# Altium PCB PCB_4-layer.PcbDoc (part 1 of 2)
Units mm, origin at the board's own origin, x right, y up, seen from the top; angles counter-clockwise.
Board outline 60 x 50 mm, 4 copper layers (Top Copper, Signal Layer 1, Signal Layer 2, Bottom Copper), stack 1.57 mm thick; 115 components, 74 nets, 379 pads, 168 vias.
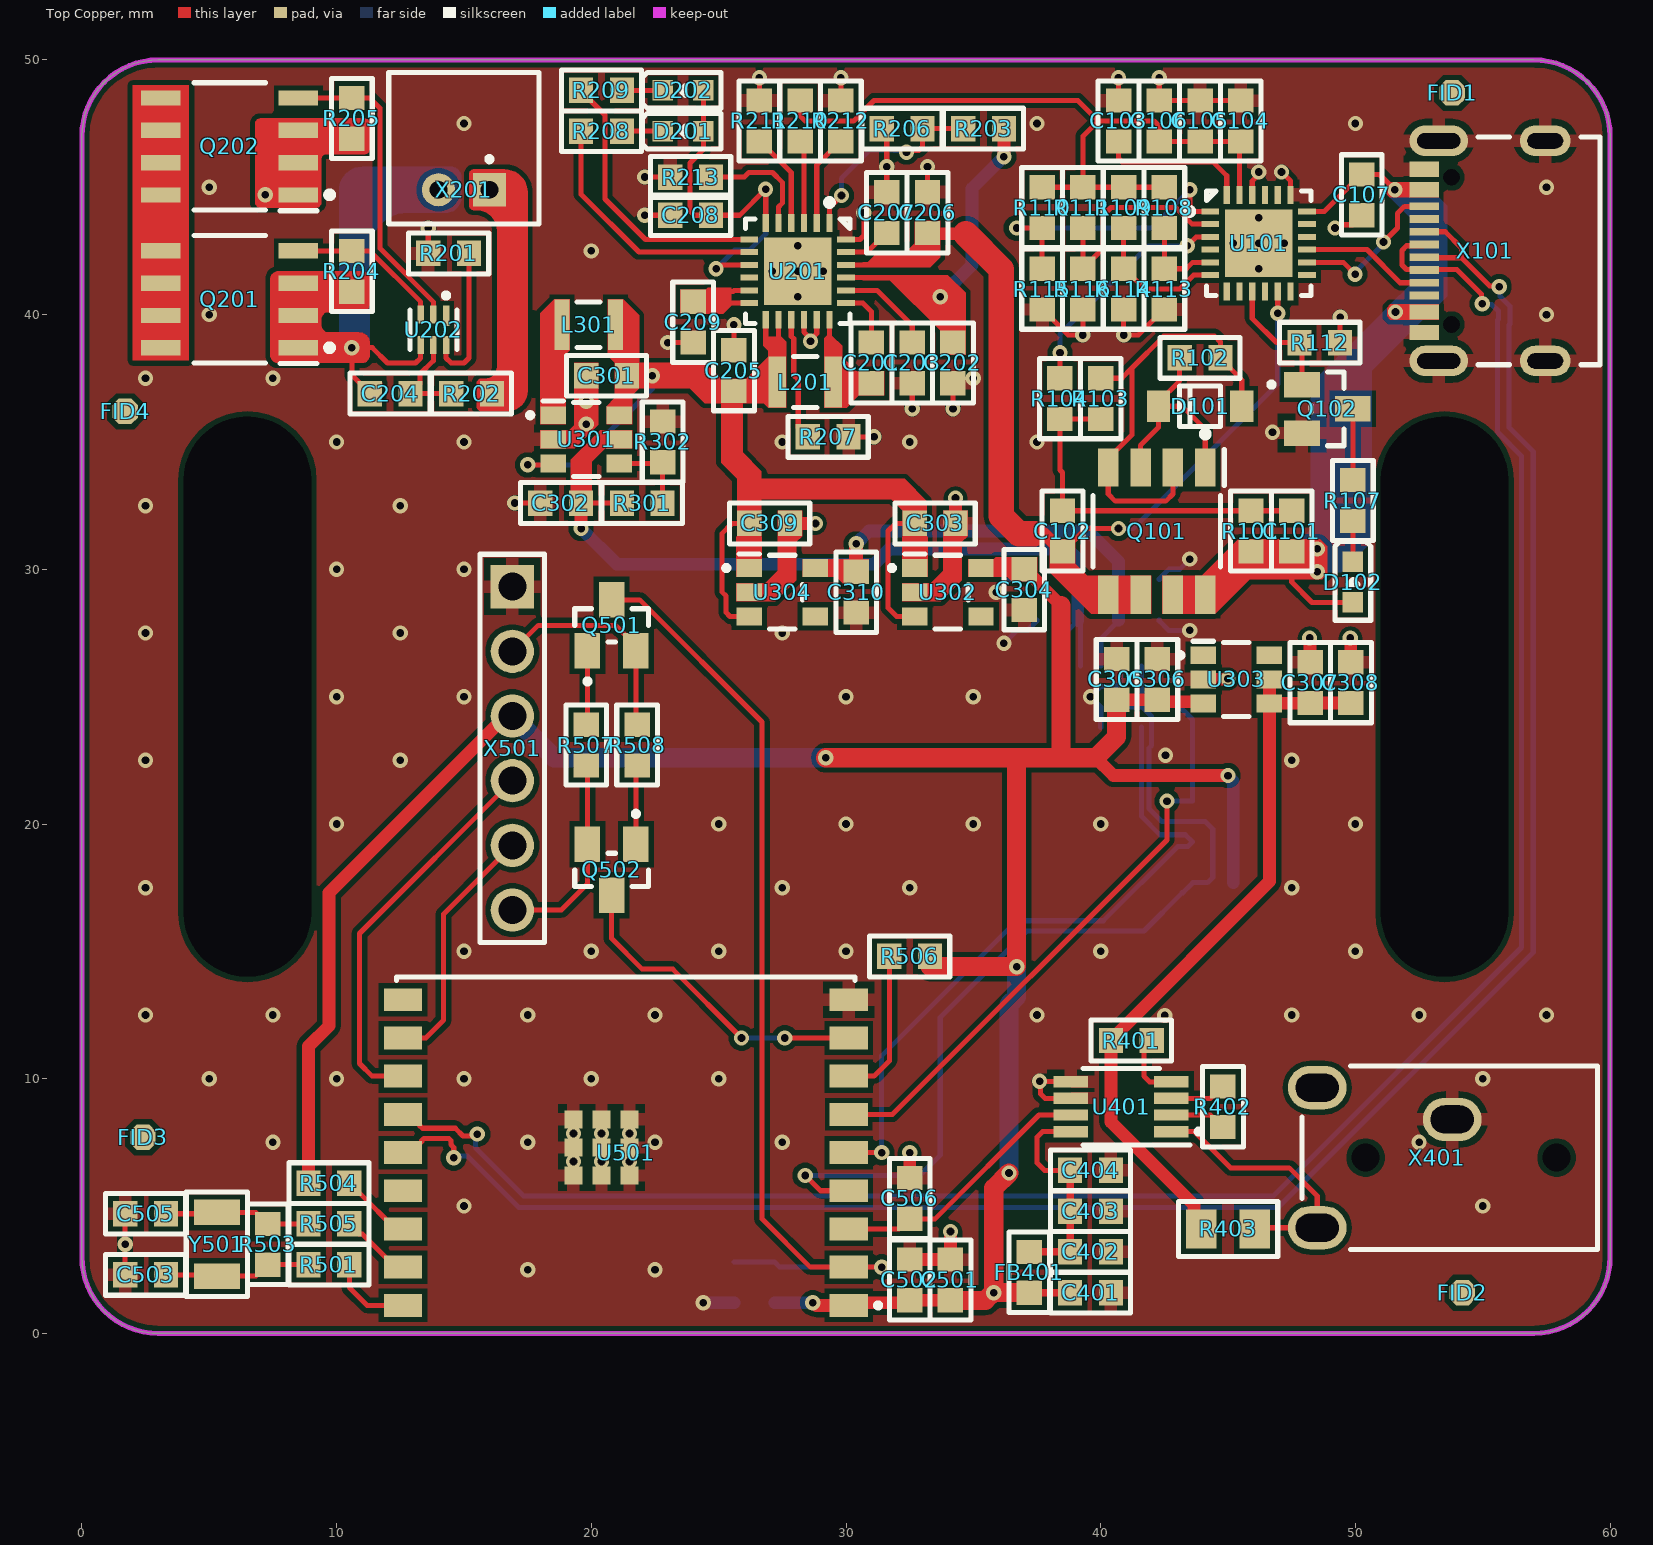
[diagram p0: Top Copper view]
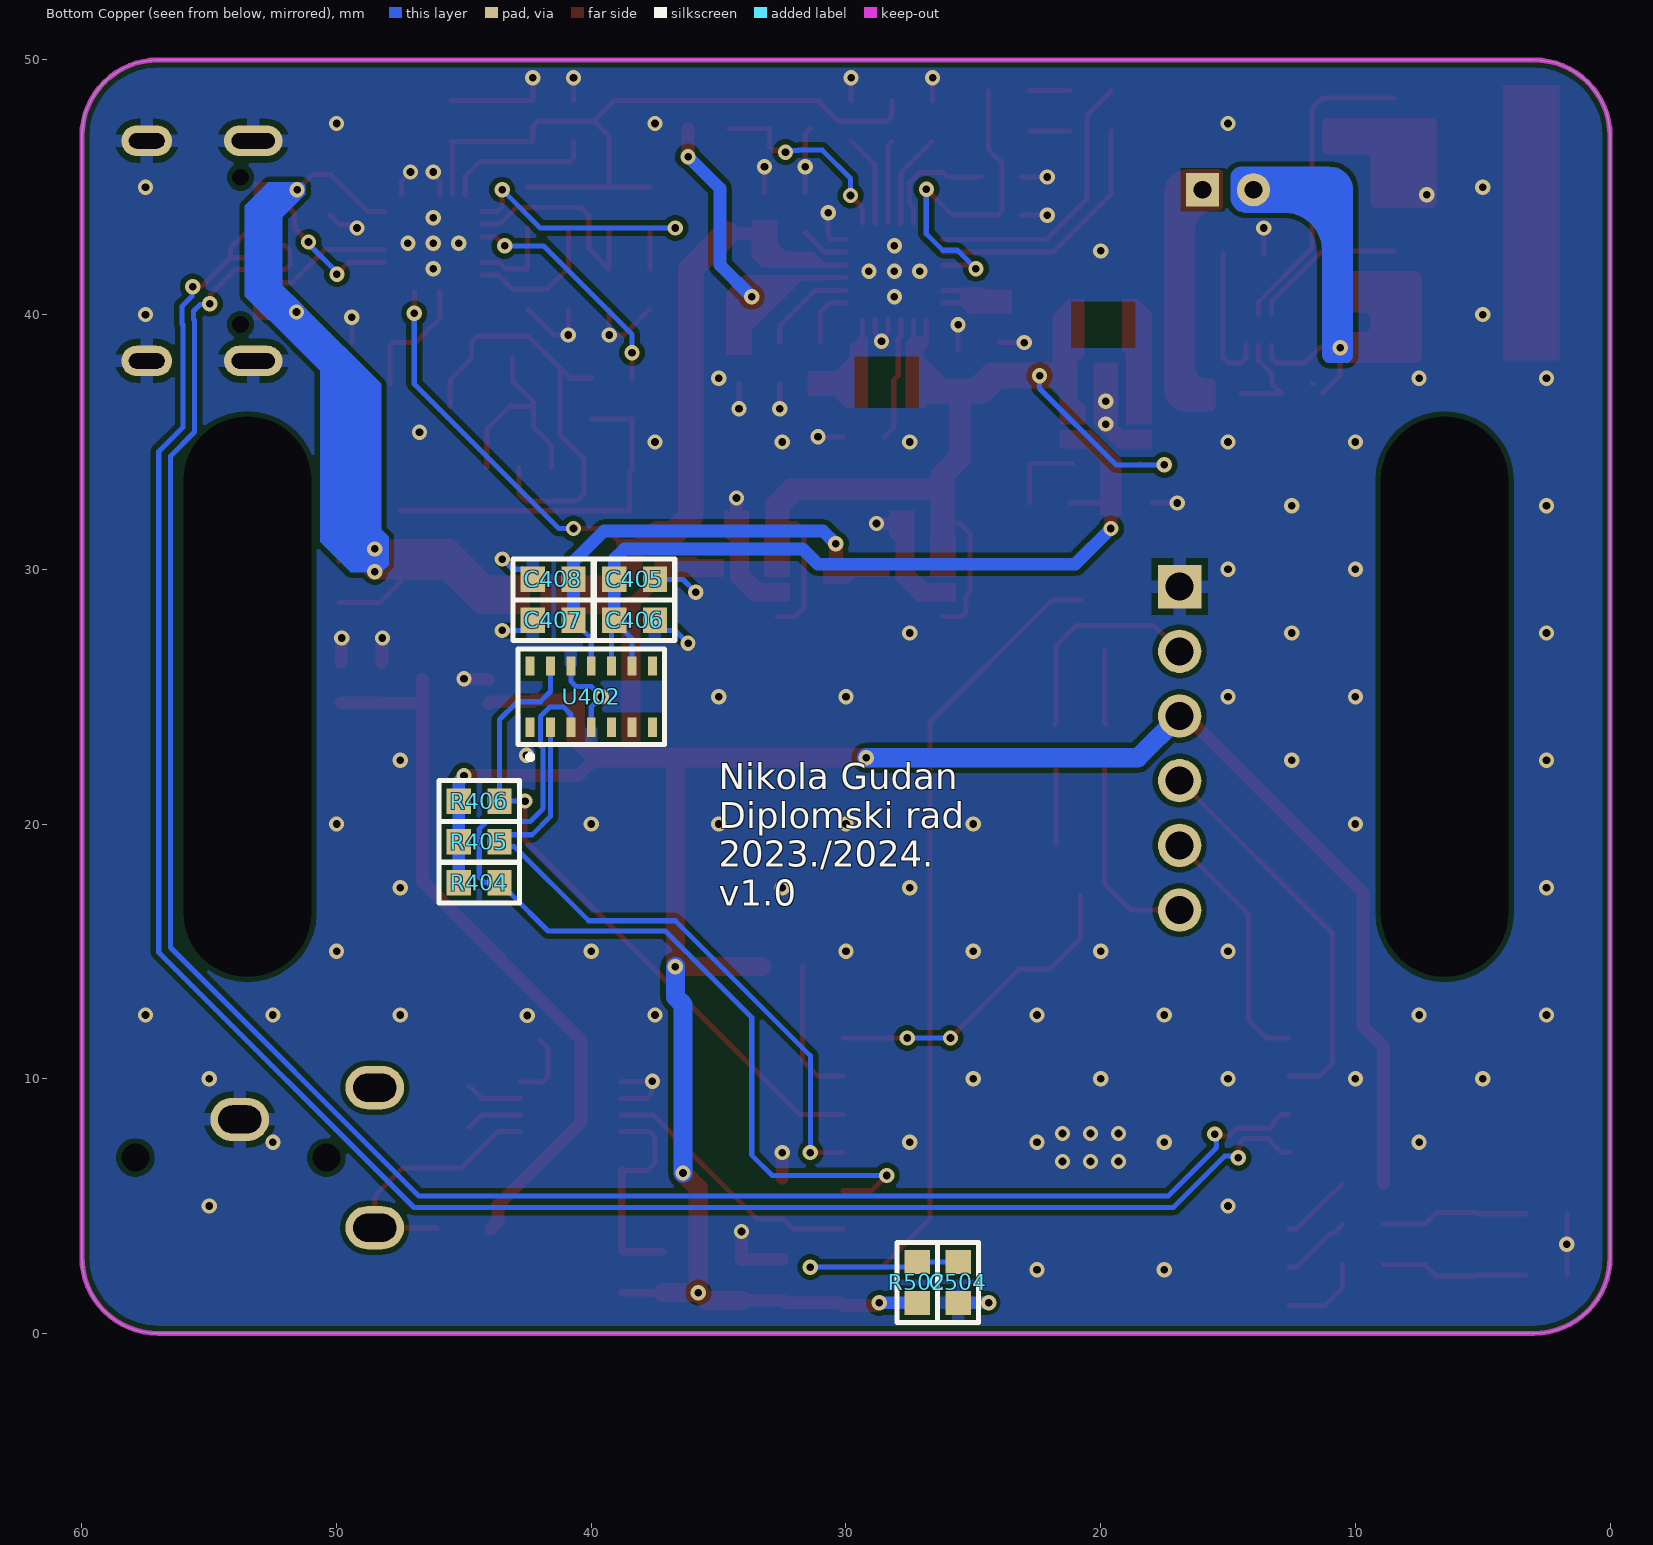
[diagram p1: Bottom Copper view, seen from below]
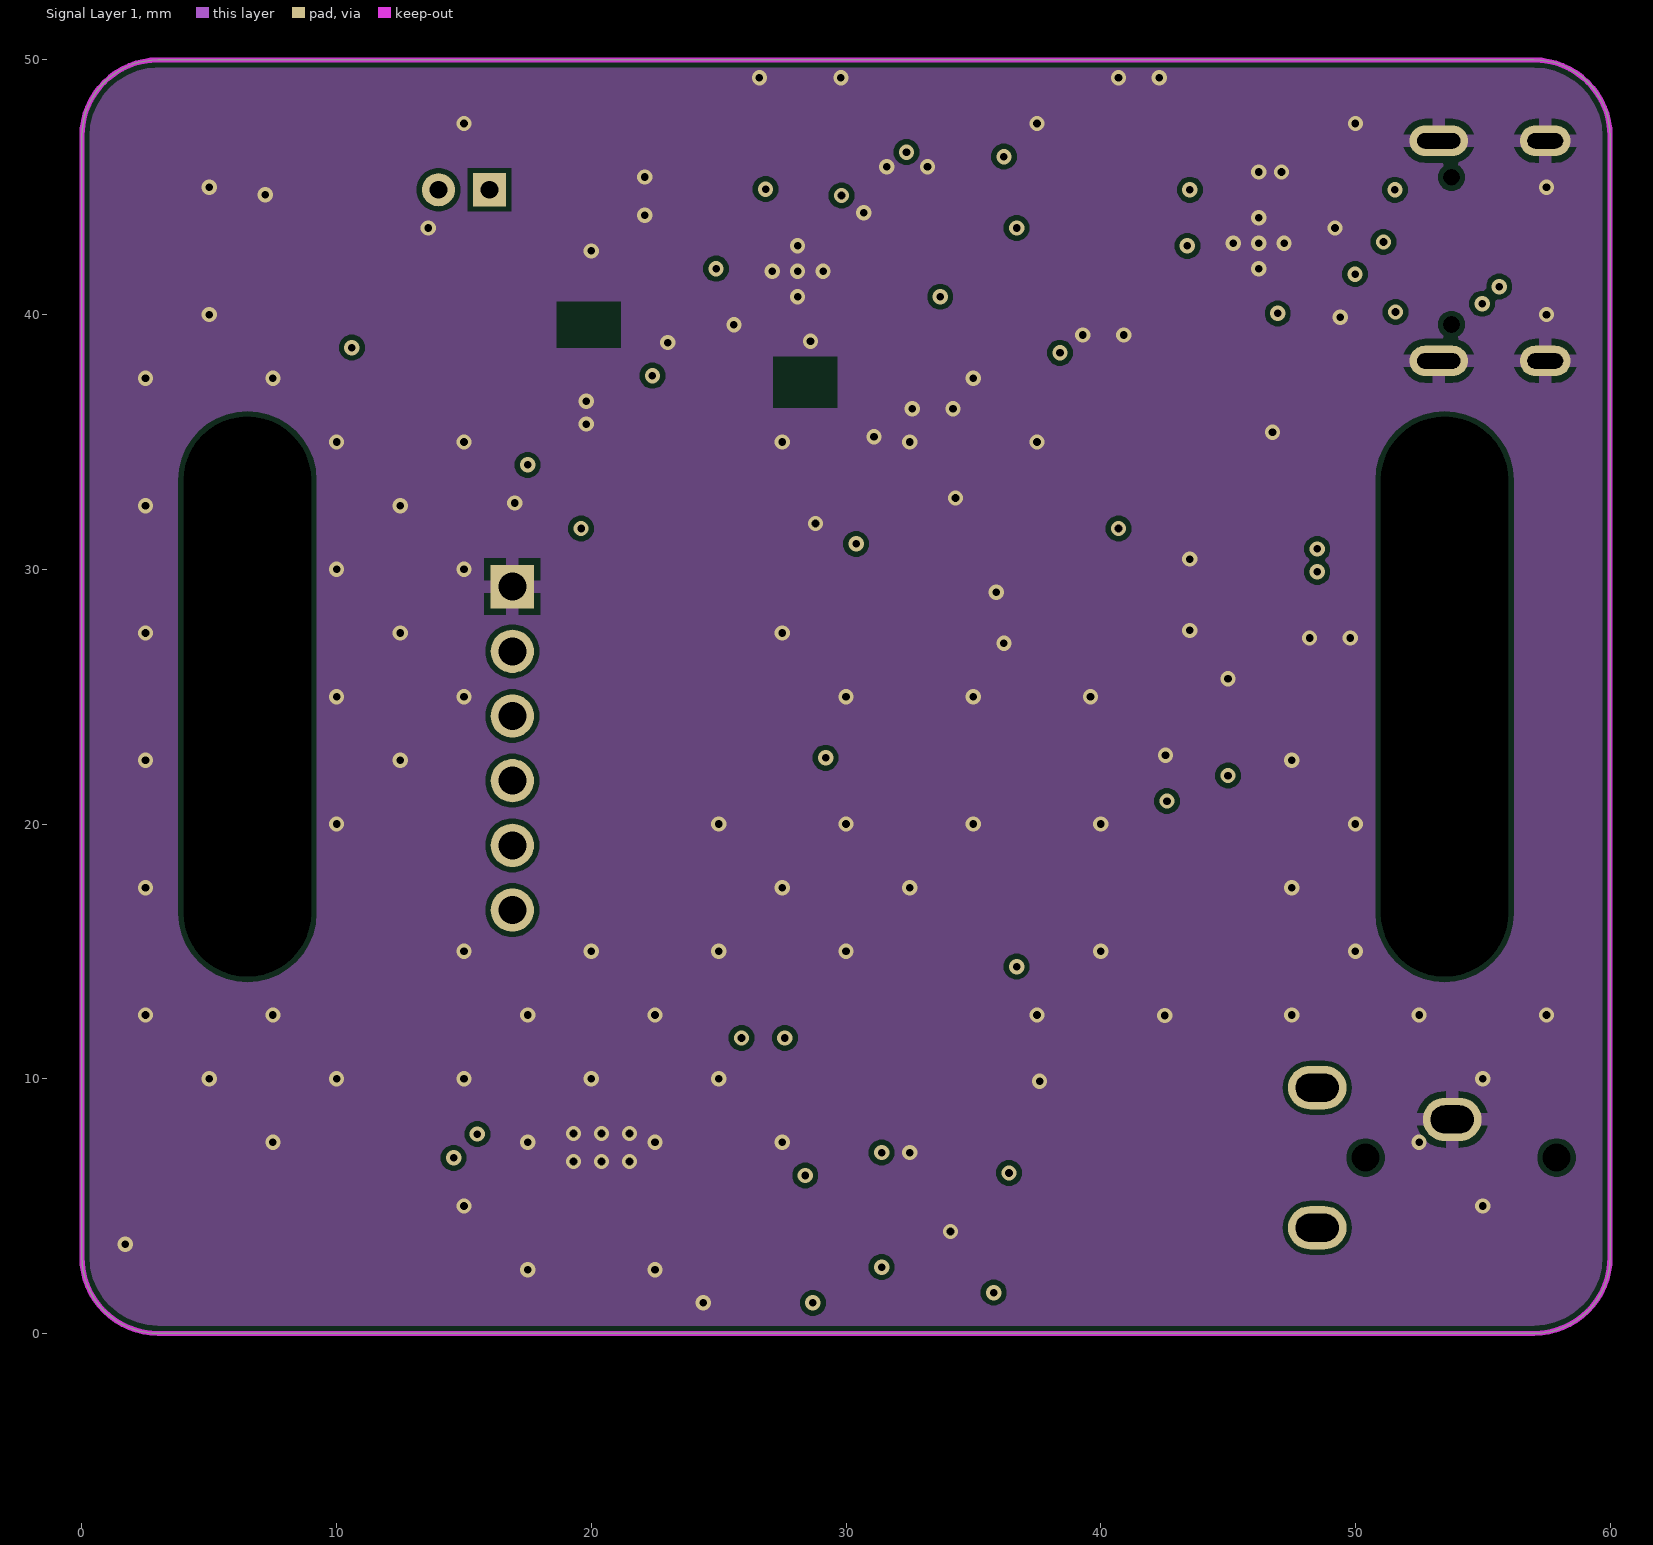
[diagram p2: Signal Layer 1]
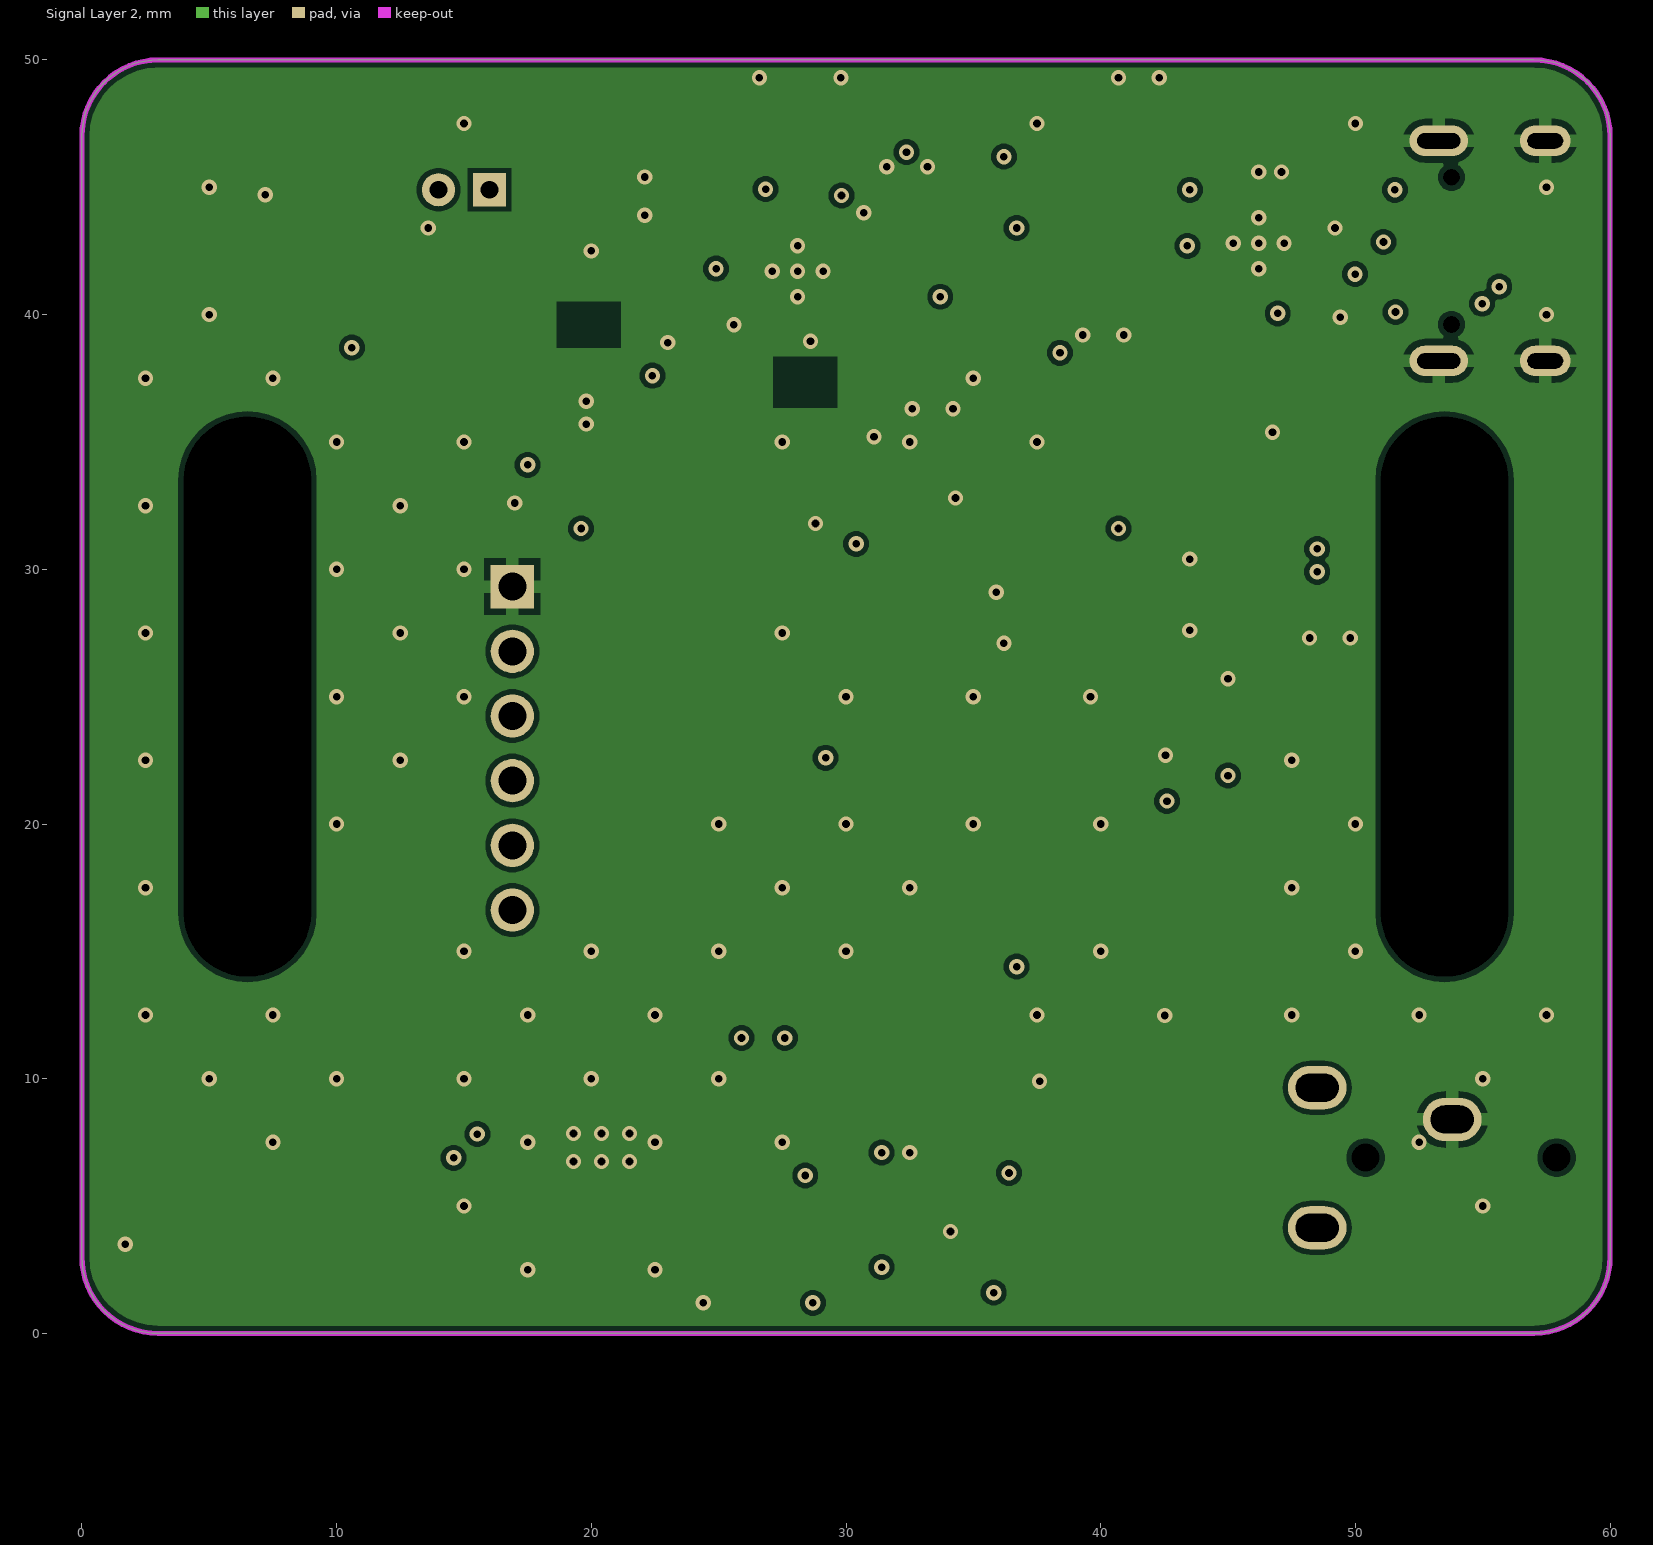
[diagram p3: Signal Layer 2]
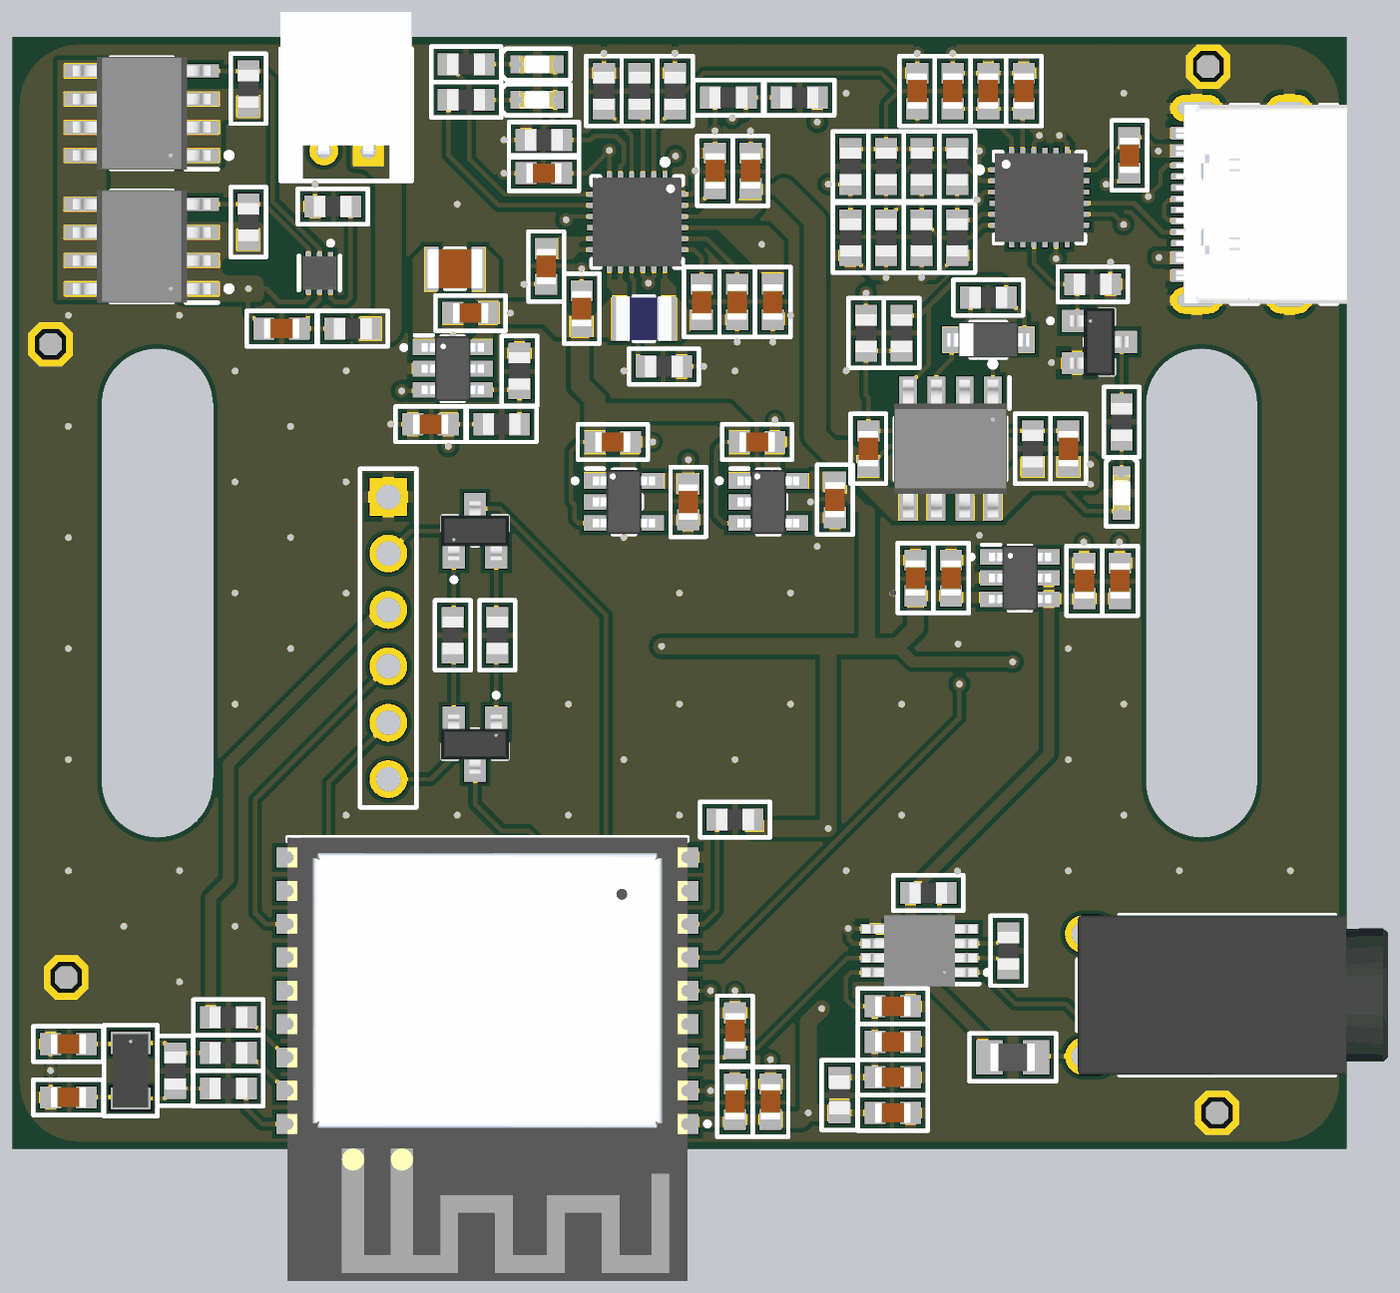
[diagram p5: 3D render of the assembled board from above, using the file's embedded part models]
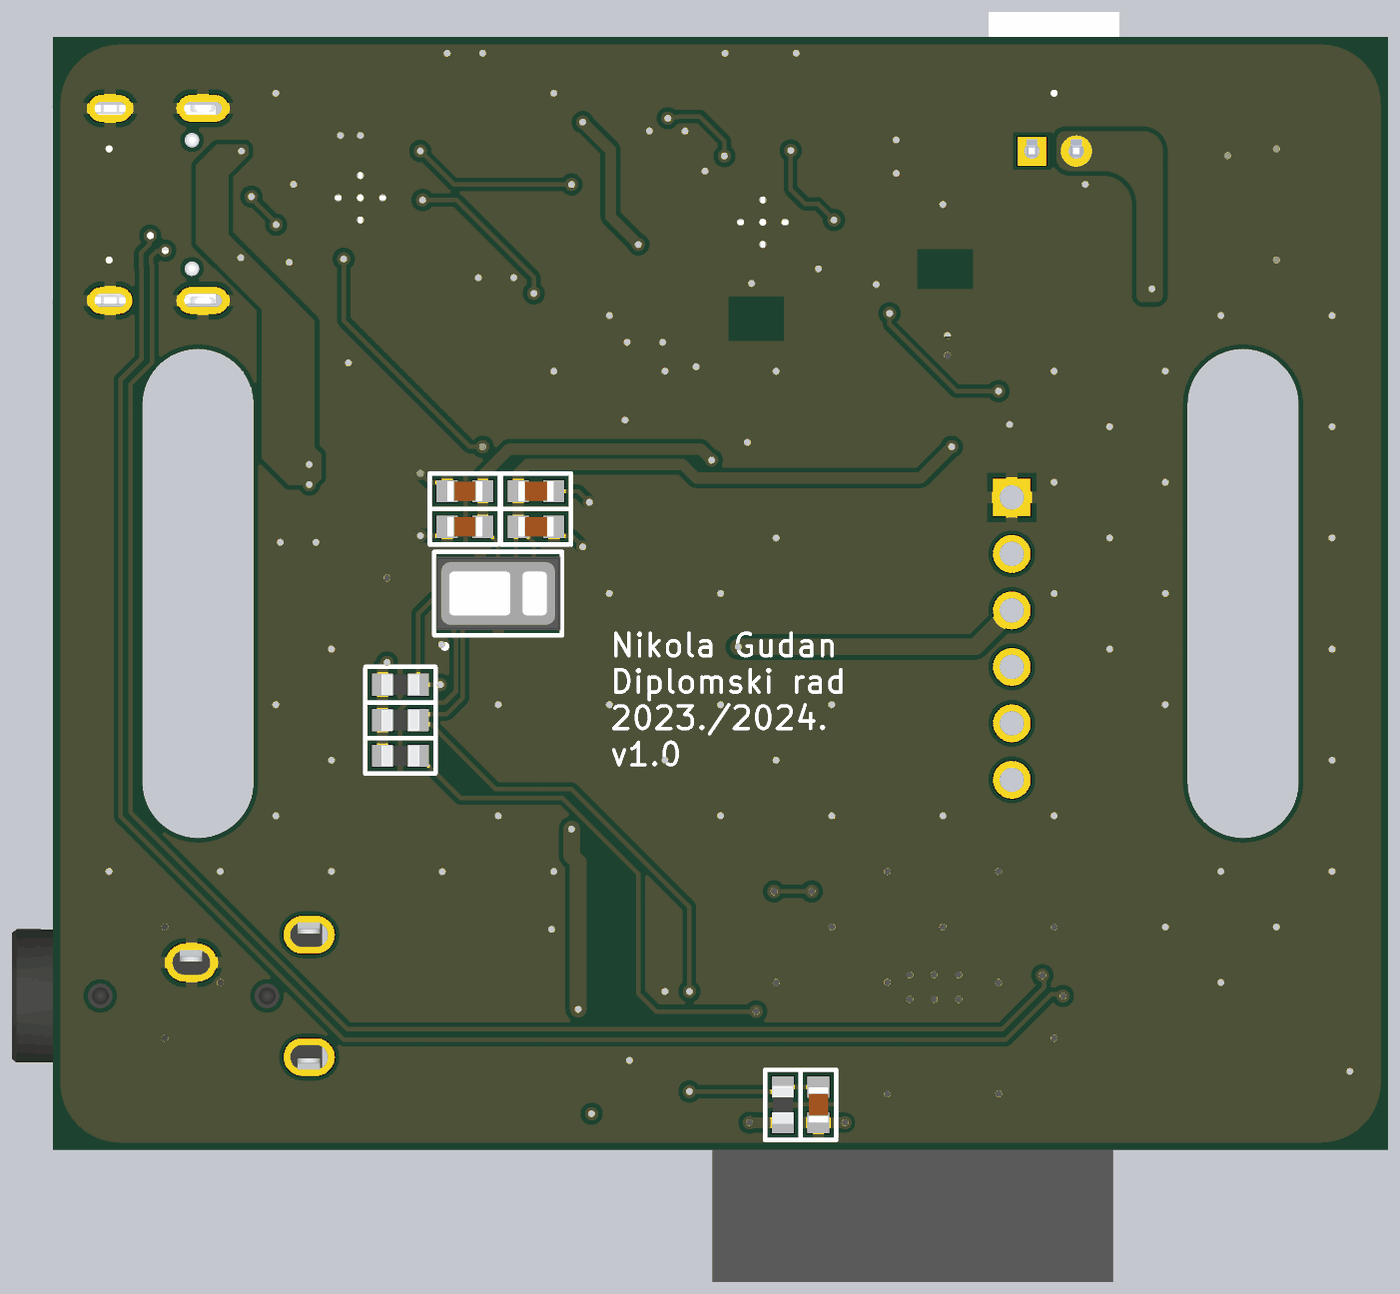
[diagram p6: 3D render of the assembled board from below, using the file's embedded part models]

## Layer stack, top to bottom
Top Mask: solder mask 0.015, Solder Resist, Dk 3.8
Top Copper: signal copper 0.035
Dielectric 1: prepreg 0.2, 7628, Dk 4.6
Signal Layer 1: signal copper 0.0175
Core: core 1.065, FR-4, Dk 4.5
Signal Layer 2: signal copper 0.0175
Dielectric 2: prepreg 0.2, 7628, Dk 4.6
Bottom Copper: signal copper 0.035
Bottom Mask: solder mask 0.015, Solder Resist, Dk 3.8

## Board outline
3,0 cw(c3,3) 0,3 0,47 cw(c3,47) 3,50 57,50 cw(c57,47) 60,47 60,3 cw(c57,3) 57,0

## Design rules (kind name [scope] priority, off if disabled: settings)
BoardOutlineClearance [All] p1: gap=0.3 ignorepadtopadclearanceinfootprint=FALSE except(0.4: Arc-SplitBarrior Arc-SplitContinuation Track-SplitBarrior Track-SplitContinuation SMDPad-SplitBarrior SMDPad-SplitContinuation THPad-SplitBarrior THPad-SplitContinuation Via-SplitBarrior Via-SplitContinuation Fill-SplitBarrior Fill-SplitContinuation Poly-SplitBarrior Poly-SplitContinuation Region-SplitBarrior Region-SplitContinuation Text-SplitBarrior Text-SplitContinuation)
Clearance MountHole [IsPad and not IsNet vs IsPad and IsPadHoleValid] p1: gap=0.2 ignorepadtopadclearanceinfootprint=FALSE except(0: SMDPad-THPad SMDPad-Hole THPad-THPad THPad-Hole; 0.089: Arc-Arc Arc-Track Arc-SMDPad Track-Track Track-SMDPad; 0.127: SMDPad-SMDPad SMDPad-Via THPad-Via Via-Via; 0.254: Arc-Via Arc-Text Track-Via Track-Text SMDPad-Text THPad-Text Via-Text Fill-Text Poly-Text Region-Text Text-Text; 0.5: Via-Hole)
Clearance "Clearance Different Nets" [All] p2: gap=0.2 ignorepadtopadclearanceinfootprint=FALSE except(0.089: Arc-Arc Arc-Track Arc-SMDPad Track-Track Track-SMDPad; 0.127: SMDPad-SMDPad SMDPad-Via THPad-Via Via-Via; 0.254: Arc-Via Arc-Text Track-Via Track-Text SMDPad-Text THPad-Text Via-Text Fill-Text Poly-Text Region-Text Text-Text; 0.5: THPad-THPad Via-Hole)
Clearance ViaInPad [IsVia and InNet('GND') vs IsPad and InNet('GND')] p3: gap=0.2 ignorepadtopadclearanceinfootprint=FALSE except(0: SMDPad-Via SMDPad-Hole; 0.089: Arc-Arc Arc-Track Arc-SMDPad Track-Track Track-SMDPad SMDPad-SMDPad; 0.127: THPad-Via; 0.254: Arc-Via Arc-Text Track-Via Track-Text SMDPad-Text THPad-Text Via-Via Via-Text Fill-Text Poly-Text Region-Text Text-Text)
Clearance "Clearance Same Nets" [All] p4: gap=0.2 ignorepadtopadclearanceinfootprint=FALSE except(0.089: Arc-Arc Arc-Track Arc-SMDPad Track-Track Track-SMDPad SMDPad-SMDPad; 0.127: SMDPad-Via THPad-Via; 0.254: Arc-Via Arc-Text Track-Via Track-Text SMDPad-Text THPad-Text Via-Via Via-Text Fill-Text Poly-Text Region-Text Text-Text)
Clearance "Clearance Bottom Layer" [OnLayer('Bottom Layer')] p5: gap=0.203 ignorepadtopadclearanceinfootprint=TRUE except(0.254: Arc-Text Track-Text SMDPad-Text THPad-Text Via-Text Fill-Text Poly-Text Region-Text Text-Text)
Clearance "Clearance Top Layer" [OnLayer('Top Layer')] p6: gap=0.203 ignorepadtopadclearanceinfootprint=TRUE except(0.254: Arc-Text Track-Text SMDPad-Text THPad-Text Via-Text Fill-Text Poly-Text Region-Text Text-Text)
DiffPairsRouting [All] p1: maxlimit=0.254 minlimit=0.203 mostfreqgap=0.254 toplayer_minwidth=0.203 toplayer_maxwidth=0.381 toplayer_prefwidth=0.381 midlayer1_minwidth=0.203 midlayer1_maxwidth=0.381 midlayer1_prefwidth=0.381 midlayer2_minwidth=0.203 midlayer2_maxwidth=0.381 midlayer2_prefwidth=0.381 bottomlayer_minwidth=0.203 bottomlayer_maxwidth=0.381 bottomlayer_prefwidth=0.381 maxuncoupledlength=12.7
HoleSize [All] p1: absolutevalues=TRUE maxlimit=6.3 minlimit=0.2 maxpercent=80.000 minpercent=20.000
MinimumAnnularRing [All] p1: minimumring=0.13
MinimumSolderMaskSliver [All] p1: minsoldermaskwidth=0.1
PlaneConnect [All] p1: pad.planeconnectstyle=Relief pad.reliefexpansion=0.508 pad.reliefentries=4 pad.reliefconductorwidth=0.254 pad.reliefairgap=0.254 via.planeconnectstyle=Direct via.reliefexpansion=0.508 via.reliefentries=4 via.reliefconductorwidth=0.254 via.reliefairgap=0.254
PolygonConnect PolygonConnect_1 [All] p1: thpad.connectstyle=Relief thpad.reliefconductorwidth=0.508 thpad.reliefentries=4 thpad.polygonreliefangle="90 Angle" thpad.airgapwidth=0.254 smdpad.connectstyle=Relief smdpad.reliefconductorwidth=0.508 smdpad.reliefentries=4 smdpad.polygonreliefangle="90 Angle" smdpad.airgapwidth=0.254 via.connectstyle=Direct via.reliefconductorwidth=0.508 via.reliefentries=4 via.polygonreliefangle="90 Angle" via.airgapwidth=0.254
RoutingCorners [All] p1: cornerstyle=Round minsetback=2.54 maxsetback=2.54
RoutingVias [All] p1: holewidth=0.5 width=1 viastyle="Through Hole" minholewidth=0.2 minwidth=0.35 maxholewidth=1 maxwidth=2
SilkToSilkClearance [All] p1: silktosilkclearance=0.1
SilkToSolderMaskClearance [IsPad] p1: minsilkscreentomaskgap=0.1 clearancetoexposedcopper=TRUE
SolderMaskExpansion [All] p1: expansion=0.102 istentingtop=FALSE
ViasUnderSMD [HasFootprint('QFN50P410X410X100-24EP') And OnLayer('Top Layer')] p1: allowed=TRUE
Width [All] p1: maxlimit=2.54 minlimit=0.089 preferedwidth=0.381
23 further rules are at their usual default settings.

## Classes and differential pairs
component class SENSORS: C401 C402 C403 C404 C405 C406 C407 C408 FB401 R401 R402 R403 R404 R405 R406 U401 U402 X401
component class POWER: C301 C302 C303 C304 C305 C306 C307 C308 C309 C310 L301 R301 R302 U301 U302 U303 U304
differential pair USB_D: +USB_D_P -USB_D_N

## Components (designator, comment, footprint, x,y, rotation, side; value= is the part's Value field where it differs from the comment)
C101 "1u" CAPC0603 47.5,31.5 r270 top
C102 "1u" CAPC0603 38.5,31.5 r270 top
C103 "1u" CAPC0603 40.7,47.6 r270 top
C104 "1u" CAPC0603 45.5,47.6 r270 top
C105 "100n" CAPC0603 43.9,47.6 r270 top
C106 "100n" CAPC0603 42.3,47.6 r270 top
C107 "3u3" CAPC0603 50.25,44.7 r90 top
C201 "10n" CAPC0603 31,38.1 r270 top
C202 "1u" CAPC0603 34.2,38.1 r90 top
C203 "4u7" CAPC0603 32.6,38.1 r90 top
C204 "100n" CAPC0603 12.1,36.9 r0 top
C205 "10u" CAPC0603 25.6,37.8 r270 top
C206 "1u" CAPC0603 33.2,44 r270 top
C207 "4u7" CAPC0603 31.6,44 r270 top
C208 "1u" CAPC0603 23.9,43.9 r0 top
C209 "1u" CAPC0603 24,39.7 r90 top
C301 "10u" CAPC0603 20.6,37.6 r0 top
C302 "10u" CAPC0603 18.8,32.6 r0 top
C303 "1u" CAPC0603 33.5,31.8 r180 top
C304 "1u" CAPC0603 37,29.2 r90 top
C305 "1u" CAPC0603 40.625,25.675 r270 top
C306 "100n" CAPC0603 42.225,25.675 r270 top
C307 "100n" CAPC0603 48.225,25.55 r270 top
C308 "100n" CAPC0603 49.825,25.55 r270 top
C309 "1u" CAPC0603 27,31.8 r180 top
C310 "1u" CAPC0603 30.4,29.1 r90 top
C401 "100n" CAPC0603 39.6,1.6 r180 top
C402 "22u" CAPC0603 39.6,3.2 r180 top
C403 "100n" CAPC0603 39.6,4.8 r180 top
C404 "10n" CAPC0603 39.6,6.4 r180 top
C405 "10u" CAPC0603 38.3,29.6 r0 bottom
C406 "100n" CAPC0603 38.3,28 r0 bottom
C407 "100n" CAPC0603 41.5,28 r180 bottom
C408 "4u7" CAPC0603 41.5,29.6 r180 bottom
C501 "10u" CAPC0603 34.1,2.1 r270 top
C502 "100n" CAPC0603 32.5,2.1 r270 top
C503 "12p" CAPC0603 2.5,2.3 r180 top
C504 "1u" CAPC0603 25.6,2 r270 bottom
C505 "12p" CAPC0603 2.5,4.7 r180 top
C506 "100n" CAPC0603 32.5,5.3 r270 top
D101 "MMSZ5240BT1G" SODFL368160X117 43.9,36.4 r0 top
D102 "Red" LED0603 49.9,29.5 r270 top
D201 "Amber" LED0603 23.6,47.2 r0 top
D202 "Green" LED0603 23.6,48.8 r0 top
FB401 "120R" FBC0603 37.2,2.4 r90 top
FID1 "FID" FIDUCIAL 53.8,48.7 r90 top
FID2 "FID" FIDUCIAL 54.2,1.6 r90 top
FID3 "FID" FIDUCIAL 2.4,7.7 r90 top
FID4 "FID" FIDUCIAL 1.7,36.2 r90 top
L201 "1u5" INDC1008 28.4,37.35 r180 top
L301 "4u7" INDC1007 19.9,39.6 r180 top
Q101 "DMP3028LSD-13" SOIC127P620X175-8 42.2,31.5 r270 top
Q102 "BSS138" SOT190P240X290-3 48.9,36.3 r270 top
Q201 "DMG4466SSS-13" SOIC127P610X175-8 5.8,40.6 r180 top
Q202 "DMG4466SSS-13" SOIC127P610X175-8 5.8,46.6 r180 top
Q501 "MMSS8050-L-TP" SOT190P240X290-3 20.8,27.8 r0 top
Q502 "MMSS8050-L-TP" SOT190P240X290-3 20.8,18.2 r180 top
R101 "10k" RESC0603 45.9,31.5 r270 top
R102 "49k9" RESC0603 43.9,38.3 r180 top
R103 "0R0" RESC0603 40,36.7 r90 top
R104 "1k" RESC0603 38.4,36.7 r270 top
R107 "10k" RESC0603 49.9,32.7 r270 top
R108 "5k1" RESC0603 42.5,44.2 r90 top
R109 "5k1" RESC0603 40.9,44.2 r90 top
R110 "0R0" RESC0603 37.7,44.2 r90 top
R111 "5k1" RESC0603 39.3,44.2 r90 top
R112 "100k" RESC0603 48.6,38.9 r180 top
R113 "1k" RESC0603 42.5,41 r90 top
R114 "2k4" RESC0603 40.9,41 r90 top
R115 "0R0" RESC0603 37.7,41 r90 top
R116 "1k" RESC0603 39.3,41 r90 top
R201 "2k2" RESC0603 14.4,42.4 r0 top
R202 "330R" RESC0603 15.3,36.9 r0 top
R203 "27k" RESC0603 35.4,47.3 r0 top
R204 "5M1" RESC0603 10.6,41.7 r270 top
R205 "5M1" RESC0603 10.6,47.7 r90 top
R206 "10k" RESC0603 32.2,47.3 r0 top
R207 "160R" RESC0603 29.3,35.2 r0 top
R208 "3k3" RESC0603 20.4,47.2 r0 top
R209 "3k3" RESC0603 20.4,48.8 r0 top
R210 "10k" RESC0603 28.2,47.6 r270 top
R211 "10k" RESC0603 26.6,47.6 r90 top
R212 "10k" RESC0603 29.8,47.6 r90 top
R213 "470R" RESC0603 23.9,45.4 r0 top
R301 "1M8" RESC0603 22,32.6 r180 top
R302 "200k" RESC0603 22.8,35 r270 top
R401 "200k" RESC0603 41.2,11.5 r180 top
R402 "49k9" RESC0603 44.8,8.9 r270 top
R403 "200k" RESC0805 45,4.1 r0 top
R404 "10k" RESC0603 44.4,17.7 r0 bottom
R405 "10k" RESC0603 44.4,19.3 r0 bottom
R406 "10k" RESC0603 44.4,20.9 r0 bottom
R501 "0R0" RESC0603 9.7,2.7 r180 top
R502 "10k" RESC0603 27.2,2 r270 bottom
R503 "0R0" RESC0603 7.3,3.5 r270 top
R504 "10k" RESC0603 9.7,5.9 r0 top
R505 "0R0" RESC0603 9.7,4.3 r180 top
R506 "10k" RESC0603 32.5,14.8 r0 top
R507 "10k" RESC0603 19.8,23.1 r90 top
R508 "10k" RESC0603 21.8,23.1 r270 top
U101 "CYPD3177-24LQXQT" QFN50P410X410X100-24EP 46.2,42.8 r0 top
U201 "BQ24166RGER" QFN50P410X410X100-24EP 28.1,41.7 r270 top
U202 "BQ29700DSER" WSON50P150X150X80-6 13.8,39.4 r270 top
U301 "TLV61220DBVR" SOT95P280X115-6 19.8,35.1 r0 top
U302 "AP2112K-3.3TRG1" SOT95P280X115-5 34,29.1 r0 top
U303 "ADR130AUJZ-REEL7" SOT95P280X115-6 45.325,25.675 r0 top
U304 "AP2112K-1.8TRG1" SOT95P280X115-5 27.5,29.1 r0 top
U401 "AD8226ARMZ-RL" SOP65P530X110-8 40.8,8.9 r180 top
U402 "MAX30101EFD+T" QFN80P330X560X155-14 40,25 r90 bottom
U501 "ESP32-C3-WROOM-02-N4" ESP32-C3-WROOM-02-N4 21.36,7.1 r180 top
X101 "HC-TYPE-C-16P-01A-R" GCT_USB4105-GF-A 56.2,42.5 r90 top
X201 "S2B-PH-K-S" JST_S2B-PH-K-S 16,44.9 r90 top
X401 "STX-3000" "AUDIO STX-3000" 53.8,8.4 r180 top
X501 "HEADER6X1" HDR6W64P254_6X1_1524X254X1150 16.9,29.32 r0 top
Y501 "32.768kHz" XTAL320X150X80 5.3,3.5 r270 top

## Footprints (in the part's own frame and the unit in brackets; to place one, negate y for a bottom-side part, rotate by r counter-clockwise, add the part's x,y. Pads: shape width x height; smd on the part's side, far side on the other; paste and mask are expansions set on the pad)
"AUDIO STX-3000" [mm] "3.5mm Audio connector, 3POS"
  round 0.5 hole 1.1 unplated mask+0.05: 0(-4.1,1.5) 0(3.4,1.5)
  oval 2.3x1.7 hole 1.1 slot 1.7 at 0 deg mask+0.05: 1(0,0) 2(5.3,-1.25) 3(5.3,4.25)
  silkscreen extent -5.7,-2.1 5.9,5.1, body extent -8.1,-2.1 5.87,5.1, height 5.99
CAPC0603 [mm]
  rect 0.95x1 smd mask+0.05: 1(-0.8,0) 2(0.8,0)
  silkscreen extent -1.58,-0.8 1.58,0.8, body extent -0.8,-0.45 0.8,0.45, height 0.8
ESP32-C3-WROOM-02-N4 [mm] "Footprint for ESP32-C3-WROOM-02-N4 modem"
  rect 1.5x0.9 smd mask+0.05: 1(-8.75,6) 2(-8.75,4.5) 3(-8.75,3) 4(-8.75,1.5) 5(-8.75,0) 6(-8.75,-1.5) 7(-8.75,-3) 8(-8.75,-4.5) 9(-8.75,-6) 10(8.75,-6) 11(8.75,-4.5) 12(8.75,-3) 13(8.75,-1.5) 14(8.75,0) 15(8.75,1.5) 16(8.75,3) 17(8.75,4.5) 18(8.75,6)
  rect 0.7x0.7 smd mask+0.05: 19(-0.14,0.9) 19(-0.14,-0.2) 19(-0.14,-1.3) 19(0.96,0.9) 19(0.96,-0.2) 19(0.96,-1.3) 19(2.06,-1.3) 19(2.06,-0.2) 19(2.06,0.9)
  Top Copper pour cut-out: -9,7.1 9,7.1 9,13.1 -9,13.1
  Signal Layer 1 pour cut-out: -9,7.1 9,7.1 9,13.1 -9,13.1
  Signal Layer 2 pour cut-out: -9,7.1 9,7.1 9,13.1 -9,13.1
  Bottom Copper pour cut-out: -9,7.1 9,7.1 9,13.1 -9,13.1
  silkscreen extent -10,-6.9 9,6.1, body extent -9,-6.9 9,13.1, height 3.35
FBC0603 [mm]
  rect 0.95x1 smd mask+0.05: 1(-0.8,0) 2(0.8,0)
  silkscreen extent -1.58,-0.8 1.58,0.8, body extent -0.88,-0.47 0.88,0.47, height 0.94
FIDUCIAL [mm]
  oct 1x1 smd mask-2539.97: 0(0,0)
GCT_USB4105-GF-A [mm] "CONN USB 2.0 TYPE C"
  round 0.5 hole 0.65 unplated mask+0.102: 0(-2.89,2.428) 0(2.89,2.428)
  oval 1.2x2 hole 0.6 slot 1.4 at 90 deg mask+0.05: 1(-4.32,-1.252) 1(4.32,-1.252)
  oval 1.2x2.3 hole 0.6 slot 1.7 at 90 deg mask+0.05: 1(-4.32,2.927) 1(4.32,2.927)
  rect 0.6x1.15 smd mask+0.05: A1-B12(-3.2,3.503) A4-B9(-2.4,3.503) B1-A12(3.2,3.503) B4-A9(2.4,3.503)
  rect 0.3x1.15 smd mask+0.05: A5(-1.25,3.503) A6(-0.25,3.503) A7(0.25,3.503) A8(1.25,3.503) B5(1.75,3.503) B6(0.75,3.503) B7(-0.75,3.503) B8(-1.75,3.503)
  silkscreen extent -4.47,-3.4 4.47,1.38, body extent -4.47,-3.85 4.47,3.85, height 3.26
HDR6W64P254_6X1_1524X254X1150 [mm] "Pin header 6X1 right angle"
  rect 1.7x1.7 hole 1.1 mask+0.05: 1(0,0)
  round 1.7 hole 1.1 mask+0.05: 2(0,-2.54) 3(0,-5.08) 4(0,-7.62) 5(0,-10.16) 6(0,-12.7)
  silkscreen extent -1.27,-13.97 1.27,1.27
INDC1007 [mm]
  rect 0.6x2 smd mask+0.05: 1(-1.05,0) 2(1.05,0)
  silkscreen extent -0.45,-0.9 0.45,0.9, body extent -1.25,-0.9 1.25,0.9, height 2
INDC1008 [mm]
  rect 0.7x2 smd mask+0.05: 1(-1.1,0) 2(1.1,0)
  silkscreen extent -0.45,-1 0.45,1, body extent -1.25,-1 1.25,1, height 1.2
JST_S2B-PH-K-S [mm] "Generic description"
  rect 1.3x1.3 hole 0.7 mask+0.05: 1(0,0)
  round 1.3 hole 0.7 mask+0.05: 2(0,2)
  silkscreen extent -1.35,-1.95 4.6,3.95, body extent -1.35,-1.95 6.25,3.95, height 4.8
LED0603 [mm] "0603 Footprint for Light Emitting diodes"
  rect 0.8x0.8 smd mask+0.05: 1(-0.8,0) 2(0.8,0)
  silkscreen extent -1.6,-0.7 1.5,0.7, body extent -0.8,-0.4 0.8,0.4, height 0.7
QFN50P410X410X100-24EP [mm] "Generic description"
  rect 0.7x0.24 smd mask+0.05: 1(-1.9,1.25) 2(-1.9,0.75) 3(-1.9,0.25) 4(-1.9,-0.25) 5(-1.9,-0.75) 6(-1.9,-1.25) 13(1.9,-1.25) 14(1.9,-0.75) 15(1.9,-0.25) 16(1.9,0.25) 17(1.9,0.75) 18(1.9,1.25)
  rect 0.24x0.7 smd mask+0.05: 7(-1.25,-1.9) 8(-0.75,-1.9) 9(-0.25,-1.9) 10(0.25,-1.9) 11(0.75,-1.9) 12(1.25,-1.9) 19(1.25,1.9) 20(0.75,1.9) 21(0.25,1.9) 22(-0.25,1.9) 23(-0.75,1.9) 24(-1.25,1.9)
  rect 2.65x2.65 smd paste-2539.97 mask+0.05: 25(0,0)
  silkscreen extent -2.8,-2.05 2.05,2.05, body extent -2,-2 2,2, height 1
QFN80P330X560X155-14 [mm] "Generic description"
  rect 0.75x0.35 smd mask+0.05: 1(-1.2,2.4) 2(-1.2,1.6) 3(-1.2,0.8) 4(-1.2,0) 5(-1.2,-0.8) 6(-1.2,-1.6) 7(-1.2,-2.4) 8(1.2,-2.4) 9(1.2,-1.6) 10(1.2,-0.8) 11(1.2,0) 12(1.2,0.8) 13(1.2,1.6) 14(1.2,2.4)
  silkscreen extent -2.47,-2.88 1.88,2.88, body extent -1.65,-2.8 1.65,2.8, height 1.65
RESC0603 [mm] "Generic description"
  rect 0.95x1 smd mask+0.05: 1(-0.8,0) 2(0.8,0)
  silkscreen extent -1.58,-0.8 1.58,0.8, body extent -0.85,-0.47 0.85,0.47, height 0.56
RESC0805 [mm] "Generic description"
  rect 1.2x1.55 smd mask+0.05: 1(-1.05,0) 2(1.05,0)
  silkscreen extent -1.95,-1.07 1.95,1.07, body extent -1,-0.63 1,0.63, height 0.6
SODFL368160X117 [mm] "SOD-123-3"
  rect 0.91x1.22 smd paste-0.025 mask+0.05: 1(-1.637,0) 2(1.637,0)
  silkscreen extent -0.8,-0.8 0.8,0.8, body extent -1.84,-0.8 1.84,0.8, height 1.35
SOIC127P610X175-8 [mm] "Generic description"
  rect 1.55x0.6 smd mask+0.05: 1(-2.7,1.905) 2(-2.7,0.635) 3(-2.7,-0.635) 4(-2.7,-1.905) 5(2.7,-1.905) 6(2.7,-0.635) 7(2.7,0.635) 8(2.7,1.905)
  silkscreen extent -4.03,-2.5 1.4,2.52, body extent -3.1,-2.54 3.1,2.54, height 1.76
SOIC127P620X175-8 [mm] "Generic description"
  rect 1.505x0.802 smd mask+0.05: 1(-2.498,1.905) 2(-2.498,0.635) 3(-2.498,-0.635) 4(-2.498,-1.905) 5(2.498,-1.905) 6(2.498,-0.635) 7(2.498,0.635) 8(2.498,1.905)
  silkscreen extent -3.91,-2.5 1.4,2.65, body extent -3.1,-2.54 3.1,2.54, height 1.76
SOP65P530X110-8 [mm] "Small Outline Package, 8 pins"
  rect 1.35x0.45 smd mask+0.05: 1(-1.975,0.975) 2(-1.975,0.325) 3(-1.975,-0.325) 4(-1.975,-0.975) 5(1.975,-0.975) 6(1.975,-0.325) 7(1.975,0.325) 8(1.975,0.975)
  silkscreen extent -3.15,-1.5 1.5,1.5, body extent -2.58,-1.6 2.58,1.6, height 1.09
SOT95P280X115-5 [mm] "Generic description"
  rect 1x0.7 smd mask+0.05: 1(-1.3,0.95) 2(-1.3,0) 3(-1.3,-0.95) 4(1.3,-0.95) 5(1.3,0.95)
  silkscreen extent -2.3,-1.45 0.8,1.5, body extent -1.4,-1.45 1.4,1.45, height 1.45
SOT95P280X115-6 [mm] "Generic description"
  rect 1x0.7 smd mask+0.05: 1(-1.3,0.95) 2(-1.3,0) 3(-1.3,-0.95) 4(1.3,-0.95) 5(1.3,0) 6(1.3,0.95)
  silkscreen extent -2.3,-1.45 0.5,1.5, body extent -1.4,-1.45 1.4,1.45, height 1.45
SOT190P240X290-3 [mm] "Generic description"
  rect 1x1.4 smd mask+0.05: 1(-0.95,-1) 2(0.95,-1) 3(0,1)
  silkscreen extent -1.45,-2.3 1.45,0.65, body extent -1.52,-1.32 1.52,1.32, height 1.12
WSON50P150X150X80-6 [mm] "Generic description"
  rect 0.8x0.25 smd mask+0.05: 1(-0.55,0.5)
  rect 0.7x0.25 smd mask+0.05: 2(-0.6,0) 3(-0.6,-0.5) 4(0.6,-0.5) 5(0.6,0) 6(0.6,0.5)
  silkscreen extent -1.45,-0.92 0.77,0.92, body extent -0.75,-0.75 0.75,0.75, height 0.77
XTAL320X150X80 [mm] "Generic description"
  rect 1x1.8 smd: 1(-1.25,0) 2(1.25,0)
  silkscreen extent -2.05,-1.2 2.05,1.2, body extent -1.65,-0.8 1.65,0.8, height 0.89

## Part data
C101 C102 C103 C104 C202 C206 C208 C209 C303 C304 C305 C309 C310 C504: library part CAPC0603-1u-10, "Ceramic capacitor, 1uF,  50V, X5R", MFR="Murata Electronics", MFRN=GRT188R61H105KE13D, Checked=Yes, Link=https://hr.mouser.com/ProductDetail/Murata-Electronics/GRT188R61H105KE13D?qs=drgMNd%252BkGPNIxxtJByMGCg%3D%3D, SPN=81-GRT188R61H105KE3D, Supplier=Mouser
C105 C106 C204 C306 C307 C308 C401 C403 C406 C407 C502 C506: library part CAPC0603-100n-10, "Ceramic capacitor, 100nF,  50V, X7R", MFR=KEMET, MFRN=C0603C104K5RACAUTO, Checked=Yes, Link=https://hr.mouser.com/ProductDetail/KEMET/C0603C104K5RACAUTO?qs=8xX%252BF9%252BWV6EZsgKw9G0PqQ%3D%3D, SPN=80-C0603C104K5RAUTO, Supplier=Mouser
C107: library part CAPC0603-3u3-10, "Ceramic capacitor, 3.3uF,  25V, X5R", MFR=TDK, MFRN=C1608X5R1E335K080AC, Checked=Yes, Link=https://hr.mouser.com/ProductDetail/TDK/C1608X5R1E335K080AC?qs=6JAMGB%252BEdkxFHV26vmpHrw%3D%3D, SPN=810-C1608X5R1E335KAC, Supplier=Mouser
C201 C404: library part CAPC0603-10n-20, "Ceramic capacitor, 10nF,  50V, X7R", MFR=KEMET, MFRN=C0603C103K5RAC7081, Checked=Yes, Link=https://hr.mouser.com/ProductDetail/KEMET/C0603C103K5RAC7081?qs=sSYV1F9c5cFnAwHdDYKUcw%3D%3D, SPN=80-C0603C103K5R7081, Supplier=Mouser
C203 C207 C408: library part CAPC0603-4u7-10, "Ceramic capacitor, 4.7uF, 25V, X5R", MFR=TDK, MFRN=C1608X5R1E475K080AC, Checked=Yes, Link=https://hr.mouser.com/ProductDetail/TDK/C1608X5R1E475K080AC?qs=dfay7wIA1uHUGZGvnFtOyQ%3D%3D, SPN=810-C1608X5R1E475K, Supplier=Mouser
C205 C301 C302 C405 C501: library part CAPC0603-10u-20, "Ceramic capacitor, 10uF,  25V, X5R", MFR="TAIYO YUDEN", MFRN=TMK107BBJ106MA-T, Checked=Yes, Link=https://hr.mouser.com/ProductDetail/TAIYO-YUDEN/TMK107BBJ106MA-T?qs=lkMpTOwszhf2a50BCYsq8A%3D%3D, SPN=963-TMK107BBJ106MA-T, Supplier=Mouser
C402: library part CAPC0603-22u-20, "Ceramic capacitor, 22uF,  10V, X5R", MFR="Samsung Electro-Mechanics", MFRN=CL10A226MP8NUNE, Checked=Yes, Link=https://hr.mouser.com/ProductDetail/Samsung-Electro-Mechanics/CL10A226MP8NUNE?qs=gRKWieUq2Hb5O0PTfRKzDQ%3D%3D, SPN=187-CL10A226MP8NUNE, Supplier=Mouser
C503 C505: library part CAPC0603-12p-1, "Ceramic capacitor, 12pF,  100V, C0G", MFR="Murata Electronics", MFRN=GCM1885C2A120FA16D, Checked=Yes, Link=https://hr.mouser.com/ProductDetail/Murata-Electronics/GCM1885C2A120FA16D?qs=QzBtWTOodeUaZCEup3XR9g%3D%3D, SPN=81-GCM1885C2A120FA6D, Supplier=Mouser
D101: "Zener Dioode, 10V, 500mW", MFR=onsemi, Checked=Yes, Link=https://hr.mouser.com/ProductDetail/onsemi/MMSZ5240BT1G?qs=P4IOph%252Bbot9clcYADZoEXg%3D%3D, MFRN=MMSZ5240BT1G, SPN=863-MMSZ5240BT1G, Supplier=Mouser
D102: library part 150060RS75000, "LED Red, 2.3V, 20mA", MFR="Würth Elektronik", Checked=Yes, Link=https://hr.mouser.com/ProductDetail/Wurth-Elektronik/150060RS75000?qs=LlUlMxKIyB3QnmZ3fw%2FVCA%3D%3D, MFRN=150060RS75000, SPN=710-150060RS75000, Supplier=Mouser
D201: library part 150060AS75000, "LED Amber, 2V, 30mA", MFR="Würth Elektronik", Checked=Yes, Link=https://hr.mouser.com/ProductDetail/Wurth-Elektronik/150060AS75000?qs=d0WKAl%252BL4KbvMBYryeof0Q%3D%3D, MFRN=150060AS75000, SPN=710-150060AS75000, Supplier=Mouser
D202: library part 150060GS75000, "LED Green, 2.1V, 20mA", MFR="Wurth Elektronik", Checked=Yes, Link=https://hr.mouser.com/ProductDetail/Wurth-Elektronik/150060GS75000?qs=LlUlMxKIyB0UYkq5lDO8nA%3D%3D, MFRN=150060GS75000, SPN=710-150060GS75000, Supplier=Mouser
FB401: library part FB0603-120R, "Ferrite bead, 120R@100MHz", MFR="TDK Corporation", MFRN=MMZ1608D121CTDH5, Checked=Yes, Link=https://hr.mouser.com/ProductDetail/TDK/MMZ1608D121CTDH5?qs=w5GL7EWTenmYwq5el8mPmQ%3D%3D, SPN=445-MMZ1608D121CTDH5TR-ND, Supplier=Mouser
FID1 FID2 FID3 FID4: library part FIDUCIAL, "Fiducial marker", MFR=?, Checked=Yes, MFRN=?, SPN=?, Supplier=Digi-Key
L201: library part INDC1008-1u5-20, "Inductor 1.5uH, 3.3A, ±20%, 60mOhm", MFR=TDK, MFRN=TMS252012ALM-1R5MTAA, Checked=Yes, Link=https://hr.mouser.com/ProductDetail/TDK/TMS252012ALM-1R5MTAA?qs=7MVldsJ5UayRLHp7atJZag%3D%3D, SPN=810-TMS252012ALM1R5M, Supplier=Mouser
L301: library part INDC1007-4u7-20, "Inductor 4.7uH, 680mA, ±20%, 260mOhm", MFR="TAIYO YUDEN", MFRN=CBC2518T4R7M, Checked=Yes, Link=https://hr.mouser.com/ProductDetail/TAIYO-YUDEN/CBC2518T4R7M?qs=sGAEpiMZZMv126LJFLh8y8CHgMb6WLnpfdgzSjZMuh8%3D, SPN=963-CBC2518T4R7M, Supplier=Mouser
Q101: "MOSFET, 2P-CH, 30V, 6A", MFR="Diodes Incorporated", Checked=Yes, Link=https://hr.mouser.com/ProductDetail/Diodes-Incorporated/DMP3028LSD-13?qs=HXx4m3XcTe1Oo5qgV%252BCezQ%3D%3D, MFRN=DMP3028LSD-13, SPN=621-DMP3028LSD-13, Supplier=Mouser
Q102: "MOSFET, N-CH, 50V, 220mA", MFR=onsemi, Checked=Yes, Link=https://hr.mouser.com/ProductDetail/onsemi-Fairchild/BSS138?qs=HK%252BeIG1iaahCeqBvjB4arg%3D%3D, MFRN=BSS138, SPN=512-BSS138, Supplier=Mouser
Q201 Q202: "MOSFET, N-CH, 30V, 10A", MFR="Diodes Incorporated", Checked=Yes, Link=https://hr.mouser.com/ProductDetail/Diodes-Incorporated/DMG4466SSS-13?qs=sJ%252BpcIzCtBiZrDaWKxeDlA%3D%3D, MFRN=DMG4466SSS-13, SPN=621-DMG4466SSS-13, Supplier=Mouser
Q501 Q502: "BJT, NPN, 25V, 1.5A", MFR="Micro Commercial Components (MCC)", Checked=No, Link=https://hr.mouser.com/ProductDetail/Micro-Commercial-Components-MCC/MMSS8050-L-TP?qs=FaVZESsvgnebflbaqJWJVQ%3D%3D, MFRN=MMSS8050-L-TP, SPN=833-MMSS8050-L-TP, Supplier=Mouser
R101 R107 R206 R210 R211 R212 R404 R405 R406 R502 R504 R506 R507 R508: library part RES0603-10k-1, "Thick film resistor, 10kOhm, 100mW", MFR=YAGEO, MFRN=RC0603FR-1010KL, Checked=Yes, Link=https://hr.mouser.com/ProductDetail/YAGEO/RC0603FR-1010KL?qs=sGAEpiMZZMtlubZbdhIBIHvQf5egq9lvqRHakiGwa0o%3D, SPN=603-RC0603FR-1010KL, Supplier=Mouser
R102 R402: library part RES0603-49k9-1, "Thick film resistor, 49.9kOhms, 100mW", MFR=YAGEO, MFRN=RC0603FR-0749K9L, Checked=Yes, Link=https://hr.mouser.com/ProductDetail/YAGEO/RC0603FR-0749K9L?qs=sGAEpiMZZMtlubZbdhIBIItYu4jZFrq85kB0%2FAGdri8%3D, SPN=603-RC0603FR-0749K9L, Supplier=Mouser
R103 R110 R115 R501 R503 R505: library part RES0603-0R0-1, "Thick film resistor, 0Ohms, 100mW", MFR=YAGEO, MFRN=RC0603FR-070RL, Checked=Yes, Link=https://hr.mouser.com/ProductDetail/YAGEO/RC0603FR-070RL?qs=0yPvnVz5%2FmpDQv43TwvCfw%3D%3D, SPN=603-RC0603FR-070RL, Supplier=Mouser
R104 R113 R116: library part RES0603-1k-1, "Thick film resistor, 1k, 100mW", MFR=YAGEO, MFRN=RC0603FR-071KL, Checked=Yes, Link=https://hr.mouser.com/ProductDetail/YAGEO/RC0603FR-071KL?qs=VU8sRB4EgwApHsk4rF%2F3zg%3D%3D, SPN=603-RC0603FR-071KL, Supplier=Mouser
R108 R109 R111: library part RES0603-5k1-1, "Thick film resistor, 5.1kOhms, 100mW", MFR=YAGEO, MFRN=RC0603FR-075K1L, Checked=Yes, Link=https://hr.mouser.com/ProductDetail/YAGEO/RC0603FR-075K1L?qs=gt6vzsuosg2jUUwxnI2PJQ%3D%3D, SPN=603-RC0603FR-075K1L, Supplier=Mouser
R112: library part RES0603-100k-1, "Thick film resistor, 100kOhms, 100mW", MFR=YAGEO, MFRN=CRCW0603100KFKEA, Checked=Yes, Link=https://hr.mouser.com/ProductDetail/Vishay-Dale/CRCW0603100KFKEA?qs=6dqgS%252BKntICWHMMdIzt5%2FQ%3D%3D, SPN=71-CRCW0603-100K-E3, Supplier=Mouser
R114: library part RES0603-2k4-1, "Thick film resistor, 2.4kOhms, 100mW", MFR=YAGEO, MFRN=RC0603FR-072K4L, Checked=Yes, Link=https://hr.mouser.com/ProductDetail/YAGEO/RC0603FR-072K4L?qs=0yPvnVz5%2FmrC6p3yyBfpHw%3D%3D, SPN=603-RC0603FR-072K4L, Supplier=Mouser
R201: library part RES0603-2k2-1, "Thick film resistor, 2.2kOhms, 100mW", MFR=YAGEO, MFRN=RC0603FR-072K2L, Checked=Yes, Link=https://hr.mouser.com/ProductDetail/YAGEO/RC0603FR-072K2L?qs=diQw95jMAeOQmNpe2MM%252BPw%3D%3D, SPN=603-RC0603FR-072K2L, Supplier=Mouser
R202: library part RES0603-330R-1, "Thick film resistor, 330Ohms, 100mW", MFR=YAGEO, MFRN=RT0603FRE13330RL, Checked=Yes, Link=https://hr.mouser.com/ProductDetail/YAGEO/RT0603FRE13330RL?qs=sGAEpiMZZMtlubZbdhIBIMaxnMKvEBNdDzkYru5tzsM%3D, SPN=603-RT0603FRE13330RL, Supplier=Mouser
R203: library part RES0603-27-1, "Thick film resistor, 27kOhm, 100mW", MFR=YAGEO, MFRN=RC0603FR-0727KL, Checked=Yes, Link=https://hr.mouser.com/ProductDetail/YAGEO/RC0603FR-0727KL?qs=HhmREhdzqomUcJ5okwKG7g%3D%3D, SPN=603-RC0603FR-0727KL, Supplier=Mouser
R204 R205: library part RES0603-5M1-1, "Thick film resistor, 5.1MOhms, 100mW", MFR=YAGEO, MFRN=RC0603FR-075M1L, Checked=Yes, Link=https://hr.mouser.com/ProductDetail/YAGEO/RC0603FR-075M1L?qs=EiqXWrxQq62YzjenV3bCvA%3D%3D, SPN=603-RC0603FR-075M1L, Supplier=Mouser
R207: library part RES0603-160R-1, "Thick film resistor, 160Ohms, 100mW", MFR=Panasonic, MFRN=ERJ-3EKF1600V, Checked=Yes, Link=https://hr.mouser.com/ProductDetail/Panasonic/ERJ-3EKF1600V?qs=iBwFsHVUAOdeFCQ863k5IQ%3D%3D, SPN=667-ERJ-3EKF1600V, Supplier=Mouser
R208 R209: library part RES0603-3k3-1, "Thick film resistor, 3.3kOhms, 100mW", MFR=YAGEO, MFRN=AC0603FR-073K3L, Checked=Yes, Link=https://hr.mouser.com/ProductDetail/YAGEO/AC0603FR-073K3L?qs=sGAEpiMZZMtlubZbdhIBINBo7nw4llFtjb1EiDJ1uvY%3D, SPN=603-AC0603FR-073K3L, Supplier=Mouser
R213: library part RES0603-470R-1, "Thick film resistor, 470R, 100mW", MFR=YAGEO, MFRN=RC0603FR-07470RL, Checked=Yes, Link=https://hr.mouser.com/ProductDetail/YAGEO/RC0603FR-07470RL?qs=gt6vzsuosg2Xv5elfMBXPA%3D%3D, SPN=603-RC0603FR-07470RL, Supplier=Mouser
R301: library part RES0603-1M8-1, "Thick film resistor, 1MOhms, 100mW", MFR="Vishay / Dale", MFRN=CRCW06031M80FKEAC, Checked=Yes, Link=https://hr.mouser.com/ProductDetail/Vishay-Dale/CRCW06031M80FKEAC?qs=sGAEpiMZZMtlubZbdhIBIEVnJA25NYWZ%2FYivauIjUrk%3D, SPN=71-CRCW06031M80FKEAC, Supplier=Mouser
R302 R401: library part RES0603-200k-1, "Thick film resistor, 200kOhms, 100mW", MFR=YAGEO, MFRN=RC0603FR-07200KL, Checked=Yes, Link=https://hr.mouser.com/ProductDetail/YAGEO/RC0603FR-07200KL?qs=sGAEpiMZZMtlubZbdhIBIPpBVm91En7n1EStA3IWCIA%3D, SPN=603-RC0603FR-07200KL, Supplier=Mouser
R403: library part RES0805-200k-1, "Thick film resistor, 200k, 125mW", MFR=YAGEO, MFRN=RC0805FR-07200KL, Checked=No, Link=https://hr.mouser.com/ProductDetail/YAGEO/RC0805FR-07200KL?qs=sGAEpiMZZMtlubZbdhIBIBEZimkhVqQ42qt0Z2hzgyc%3D, SPN=603-RC0805FR-07200KL, Supplier=Mouser
U101: "Generic Description", MFR="Infineon Technologies", Checked=Yes, Link=https://hr.mouser.com/ProductDetail/Infineon-Technologies/CYPD3177-24LQXQT?qs=PzGy0jfpSMvUfBLYWBYBLA%3D%3D, MFRN=CYPD3177-24LQXQT, SPN=727-CYPD3177-24LQXQT, Supplier=Mouser
U201: library part "IC BATT CHG LI-ION BQ24166", "IC Battery Charger, Li-Ion, 1 Cell, 3.7V, 2.5A", MFR="Texas Instruments", Checked=Yes, Link=https://hr.mouser.com/ProductDetail/Texas-Instruments/BQ24166RGER?qs=63LrFSLv3u%252BNG%2F5wEYuQNQ%3D%3D, MFRN=BQ24166RGER, SPN=595-BQ24166RGER, Supplier=Mouser
U202: library part "IC BATT PROT BQ29700DSER", "Battery Protection IC Li-Ion 1Cell", MFR="Texas Instruments", Checked=Yes, Link=https://hr.mouser.com/ProductDetail/Texas-Instruments/BQ29700DSER?qs=%2Fd%252BFzHvH4c3zNh7Hkm%2Fvbw%3D%3D, MFRN=BQ29700DSER, SPN=595-BQ29700DSER, Supplier=Mouser
U301: library part "BOOST TLV61220DBVR", "Boost converter, 0.7V to 5.5V Input", MFR="Texas Instruments", Checked=No, Link=https://hr.mouser.com/ProductDetail/Texas-Instruments/TLV61220DBVR?qs=l6ZoeTYLMwOr7SC1DbpfZQ%3D%3D, MFRN=TLV61220DBVR, SPN=595-TLV61220DBVR, Supplier=Mouser
U302: library part "IC REG LINEAR AP2112K-3.3TRG1", "Linear LDO Voltage Regulator, 3.3V, 600mA", MFR="Diodes Incorporated", Checked=Yes, Link=https://hr.mouser.com/ProductDetail/Diodes-Incorporated/AP2112K-3.3TRG1?qs=sGAEpiMZZMug9GoBKXZ7571prORexT17l%252BdJyLTK7uthQsHsGnYZAw%3D%3D, MFRN=AP2112K-3.3TRG1, SPN=621-AP2112K-3.3TRG1, Supplier=Mouser
U303: library part "IC VREF ADR130AUJZ-REEL7", "Voltage reference, 0.5V or 1V", MFR="Analog Devices", Checked=No, Link=https://hr.mouser.com/ProductDetail/Analog-Devices/ADR130AUJZ-REEL7?qs=WIvQP4zGangoCvzzhVb1kQ%3D%3D, MFRN=ADR130AUJZ-REEL7, SPN=584-ADR130AUJZ-R7, Supplier=Mouser
U304: library part "IC REG LINEAR AP2112K-1.8TRG1", "Linear LDO Voltage Regulator, 1.8V, 600mA", MFR="Diodes Incorporated", Checked=Yes, Link=https://hr.mouser.com/ProductDetail/Diodes-Incorporated/AP2112K-1.8TRG1?qs=x6A8l6qLYDBx1xhw8AX2cw%3D%3D, MFRN=AP2112K-1.8TRG1, SPN=621-AP2112K-1.8TRG1, Supplier=Mouser
U401: "Instrumentation Amplifier, 1 CH", MFR="Analog Devices", Checked=No, Link=https://hr.mouser.com/ProductDetail/Analog-Devices/AD8226ARMZ-RL?qs=sGAEpiMZZMtuedWc5vOqGOg2P2zBW3ua3%252BX8tTUXoKc%3D, MFRN=AD8226ARMZ-RL, SPN=584-AD8226ARMZ-R, Supplier=Mouser
U402: library part "BIO IC MAX30101EFD+T", "Pulse Oximeter and Heart-Rate Sensor for Wearable Health", MFR="Analog Devices Inc./Maxim Integrated", Checked=No, Link=https://hr.mouser.com/ProductDetail/Analog-Devices-Maxim-Integrated/MAX30101EFD%2bT?qs=sITqEBh490kEm6CNcTH1tQ%3D%3D, MFRN=MAX30101EFD+T, SPN=700-MAX30101EFD+T, Supplier=Mouser
U501: "RF transceiver module, Bluetooth, WiFi", MFR="Espressif Systems", Checked=Yes, Link=https://hr.mouser.com/ProductDetail/Espressif-Systems/ESP32-C3-WROOM-02-N4?qs=sGAEpiMZZMu3sxpa5v1qrhrB%252BBlYHY1O2YkhFjq1w70%3D, MFRN=ESP32-C3-WROOM-02-N4, SPN=356-ESP32C3WROOM02N4, Supplier=Mouser
X101: library part "CONN USB 2.0 TYPE C", "USB TYPE-C 3.1, 3A", MFR=GCT, MFRN=USB4105-GF-A, Checked=Yes, Link=https://hr.mouser.com/ProductDetail/GCT/USB4105-GF-A?qs=KUoIvG%2F9IlY%2FMLlBMpStpA%3D%3D, SPN=640-USB4105-GF-A, Supplier=Mouser
X201: library part "JST S2B-PH-K-S", "JST PH Connector 2POS R/A THT", MFR="JST Sales America Inc.", Checked=Yes, Link=https://www.digikey.com/en/products/detail/jst-sales-america-inc/S2B-PH-K-S/926626, MFRN=S2B-PH-K-S, SPN=455-1719-ND, Supplier=Digi-Key
X401: library part "AUDIO STX-3000", "3.5mm Audio connector, 3POS", MFR=Kycon, Checked=No, Link=https://hr.mouser.com/ProductDetail/Kycon/STX-3000?qs=sGAEpiMZZMv0W4pxf2HiV8G8PVhdMuD0EShHAQC6epY%3D, MFRN=STX-3000, SPN=806-STX-3000, Supplier=Mouser
X501: "Pin header, 6x1, 100mil pitch", MFR="Adam Tech", MFRN=PH1-06-UA, Checked=Yes, Link=https://hr.mouser.com/ProductDetail/Adam-Tech/PH1-06-UA?qs=HoCaDK9Nz5eIYt3TJpOa9Q%3D%3D, SPN=737-PH1-06-UA, Supplier=Mouser
Y501: library part "FC-135R 32.7680KA-AC", "Crystal, 32.768Hz, 9pF, 50kOhms", MFR="Seiko Epson", Checked=Yes, Link=https://hr.mouser.com/ProductDetail/Epson-Timing/FC-135R-32.7680KA-AC?qs=f9yNj16SXrKSyqlBEaNvJg%3D%3D, MFRN="FC-135R 32.7680KA-AC", SPN=732-5R32.7680KA-AC, Supplier=Mouser

## Free pads (board coordinates)
  rrect50% 0x0 hole 5 slot 22 at 90 deg unplated mask+0.05: 0(6.5,25) 0(53.5,25)

## Via types
v1: diameter 0.6, hole 0.3, Top Copper to Bottom Copper, tented both sides, 152 vias
v2: diameter 0.6, hole 0.3, Top Copper to Bottom Copper, 16 vias

## Nets (pads, with @x,y where several pads share a name; then routed paths per layer and width w, separated by ;. In a path a pad name is that pad's centre, name@x,y a point inside that pad or via, vN(x,y) a via of type N, cw(c..) or ccw(c..) an arc to the next point about the centre after c; other vN are vias at no path point)
+0.5VREF: C307.2 C308.2 R401.2 R403.1 U303.4 U303.5 | length 28.8
  Top Copper w0.5: R403.1@43.95,4.1 43.659,4.391 43.659,5.041 40.4,8.3 40.4,11.525 46.625,17.75 U303.4@46.625,24.725 ; U303.5@46.625,25.675 U303.4@46.625,24.725 ; C308.2@49.825,24.75 C307.2@48.225,24.75 48.212,24.737 46.638,24.737 U303.4@46.625,24.725
+0.5VREF_R: R401.1 U401.4 | length 2.7
  Top Copper w0.2: R401.1@42,11.5 41.7,11.2 41.7,10.1 41.925,9.875 U401.4@42.775,9.875
+1.8V: C310.2 C407.2 C408.2 U304.5 U402.11 | length 16.5
  Top Copper w0.55: C310.2@30.4,29.9 v1(30.4,31)
  Bottom Copper w0.2: U402.11@40,26.2 40,27.275 40.7,27.975 C407.2@40.7,28
  Bottom Copper w0.5: v1(30.4,31) 30.9,31.5 39.5,31.5 40.7,30.3 C408.2@40.7,29.6 C407.2@40.7,28
+1.8VUSBPD: C103.2 U101.24 | length 5.9
  Top Copper w0.2: C103.2@40.7,46.8 40.7,46.136 40.836,46 44.4,46 44.95,45.45 U101.24@44.95,44.7
+3.3V: C304.2 C305.2 C306.2 C401.2 C501.2 C502.2 FB401.1 R404.2 R405.2 R406.2 R502.2 R504.1 R506.2 U302.5 U303.3 U501.1 X501.3 | length 105.8
  Top Copper w0.3: FB401.1@37.2,1.6 C401.2@38.8,1.6
  Top Copper w0.5: R504.1@8.9,5.9 8.9,11.275 9.7,12.075 9.7,17.3 16.64,24.24 X501.3@16.9,24.24 ; v1(28.7,1.2) 28.727,1.2 28.827,1.1 U501.1@30.11,1.1 30.21,1.2 32.4,1.2 C502.2@32.5,1.3 C501.2@34.1,1.3 ; C304.2@37,30 37.025,30 38.441,28.584 ; 39.8,22.6 40.5,21.9 v1(45,21.9) ; C305.2@40.625,24.875 C306.2@42.225,24.875 42.3,24.8 43.95,24.8 U303.3@44.025,24.725
  Top Copper w0.75: v1(29.2,22.6) 36.7,22.6 ; R506.2@33.3,14.4 v1(36.7,14.4) 36.7,22.6 ; C501.2@34.1,1.3 35.473,1.3 35.773,1.6 v1(35.8,1.6) ; v1(36.4,6.3) 35.8,5.7 v1(35.8,1.6) ; FB401.1@37.2,1.6 v1(35.8,1.6) ; 38.441,22.659 38.441,28.584 ; C305.2@40.625,24.875 40.625,23.425 39.8,22.6 36.7,22.6
  Bottom Copper w0.5: R502.2@27.2,1.2 v1(28.7,1.2) ; v1(45,21.9) 45,21.881 45.2,21.681 R406.2@45.2,20.9 R405.2@45.2,19.3 R404.2@45.2,17.7
  Bottom Copper w0.75: X501.3@16.9,24.24 18.54,22.6 v1(29.2,22.6) ; v1(36.4,6.3) 36.4,12.914 36.7,13.214 v1(36.7,14.4)
+3.3VA: C402.2 C403.2 C404.2 FB401.2 U401.8 | length 8.6
  Top Copper w0.2: C404.2@38.8,6.4 37.8,6.4 37.5,6.7 37.5,7.7 37.725,7.925 U401.8@38.825,7.925
  Top Copper w0.3: FB401.2@37.2,3.2 C402.2@38.8,3.2 C403.2@38.8,4.8 C404.2@38.8,6.4
+3.3VUSBPD: C104.2 C105.2 C106.2 R108.2 R109.2 R110.2 R111.2 R210.1 U101.23 | length 29.1
  Top Copper w0.2: R210.1@28.2,48.4 28.2,47.8 28.4,47.6 30.3,47.6 31.1,48.4 39.1,48.4 39.9,47.6 ; R110.2@37.7,45 R111.2@39.3,45 ; R108.2@42.5,45 R109.2@40.9,45 R111.2@39.3,45 ; U101.23@45.45,44.7 45.45,46.75 C104.2@45.5,46.8 C105.2@43.9,46.8 C106.2@42.3,46.8 42.3,47.4 42.1,47.6 39.9,47.6 ; R111.2@39.3,45 39.3,47 39.9,47.6
+5V: C302.2 C405.2 C406.2 R301.2 U301.5 U402.9 U402.10 | length 29.4
  Top Copper w0.2: C302.2@19.6,32.6 R301.2@21.2,32.6
  Top Copper w0.5: v1(19.6,31.6) C302.2@19.6,32.6
  Bottom Copper w0.2: U402.9@38.4,26.2 38.4,27.275 C406.2@39.1,27.975 ; C406.2@39.112,27.988 39.2,27.9 U402.10@39.2,26.2
  Bottom Copper w0.5: v1(19.6,31.6) 21.004,30.196 31.096,30.196 31.7,30.8 38.7,30.8 39.1,30.4 C405.2@39.1,29.6 C406.2@39.1,28 C406.2@39.1,27.975
+VBAT: C209.2 U201.11 U201.12 | length 2
  Top Copper w0.2: 25.2,40.45 U201.12@26.2,40.45 ; 25.2,40.9 25.56,40.9 25.61,40.95 U201.11@26.2,40.95
AMP_RG1: R402.2 U401.2 | length 2.2
  Top Copper w0.2: U401.2@42.775,8.575 44.3,8.575 44.775,8.1 R402.2@44.8,8.1
AMP_RG2: R402.1 U401.3 | length 2.2
  Top Copper w0.2: U401.3@42.775,9.225 44.3,9.225 44.775,9.7 R402.1@44.8,9.7
BOOST_FB: R301.1 R302.2 U301.4 | length 3.2
  Top Copper w0.2: U301.4@21.1,34.15 22.75,34.15 22.8,34.1 R301.1@22.8,32.6
BOOST_SW: L301.2 U301.1
BP_BAT: C204.2 R202.1 U202.5 | length 3.9
  Top Copper w0.2: U202.5@13.8,38.8 13.8,38.187 13.275,37.662 13.275,37.275 C204.2@12.9,36.9 R202.1@14.5,36.9
BP_COUT: Q202.4 R205.2 U202.2 | length 12.3
  Top Copper w0.2: Q202.4@8.5,48.505 8.505,48.5 R205.2@10.6,48.5 11.3,48.5 11.7,48.1 11.7,42.6 13.8,40.5 U202.2@13.8,40
BP_DD: Q201.5 Q201.6 Q201.7 Q201.8 Q202.5 Q202.6 Q202.7 Q202.8
BP_DOUT: Q201.4 R204.1 U202.3 | length 6.1
  Top Copper w0.2: Q201.4@8.5,42.505 8.505,42.5 R204.1@10.6,42.5 11.3,42.5 13.3,40.5 U202.3@13.3,40
CHG_BOOT: C201.1 U201.19 | length 2.4
  Top Copper w0.2: U201.19@30,40.45 30.662,40.45 31,40.112 C201.1@31,38.9
CHG_C\H\G\: R208.1 U201.8 | length 10
  Top Copper w0.2: R208.1@19.6,47.2 19.6,44.725 21.871,42.454 25.171,42.454 25.175,42.45 U201.8@26.2,42.45
CHG_DRV: C208.2 D201.2 D202.2 U201.6 U201.9 | length 15.4
  Top Copper w0.2: D202.2@24.4,48.8 D201.2@24.4,47.2 24.4,46.475 23.875,45.95 23.875,44.075 24.05,43.9 C208.2@24.7,43.9 25.825,43.9 26.844,44.919 v1(26.844,44.923) ; v1(24.9,41.8) 25.008,41.8 25.158,41.95 U201.9@26.2,41.95 ; U201.6@26.85,43.6 v1@26.85,44.921
  Bottom Copper w0.2: v1(24.9,41.8) 25.624,42.524 26.199,42.524 26.85,43.175 26.85,44.917 v1(26.844,44.923)
CHG_ILIM: R207.1 U201.15 | length 4.9
  Top Copper w0.2: U201.15@27.85,39.8 27.85,39.149 27.95,39.049 27.95,37.612 28.125,37.437 28.125,35.575 R207.1@28.5,35.2
CHG_ISET: R213.2 U201.5 | length 4.7
  Top Copper w0.2: R213.2@24.7,45.4 26.006,45.4 26.185,45.579 27.112,45.579 27.5,45.191 27.5,44.375 27.35,44.225 U201.5@27.35,43.6
CHG_P\G\: R209.1 U201.7 | length 11
  Top Copper w0.2: R209.1@19.6,48.8 19.6,48.775 20.536,47.839 20.536,44.539 22.125,42.95 U201.7@26.2,42.95
CHG_PMIDI: C203.2 U201.20 | length 3.8
  Top Copper w0.2: U201.20@30,40.95 31.225,40.95 32.6,39.575 C203.2@32.6,38.9
CHG_PMIDU: C207.2 U201.23 | length 1.9
  Top Copper w0.2: U201.23@30,42.45 30.825,42.45 31.575,43.2 C207.2@31.6,43.2
CHG_SW: C201.2 L201.1 U201.18 | length 0.9
  Top Copper w0.2: 29.35,38.9 U201.18@29.35,39.8
CHG_USB1: R211.1 U201.4 | length 3.7
  Top Copper w0.2: R211.1@26.6,46.8 26.625,46.8 27.85,45.575 U201.4@27.85,43.6
CHG_USB2: R210.2 U201.3 | length 3.3
  Top Copper w0.2: R210.2@28.2,46.8 28.35,46.65 U201.3@28.35,43.6
CHG_USB3: R212.1 U201.2 | length 3.6
  Top Copper w0.2: U201.2@28.85,43.6 28.85,45.875 29.775,46.8 R212.1@29.8,46.8